# EAGLE board MainMicro (EAGLE 9.6.2)
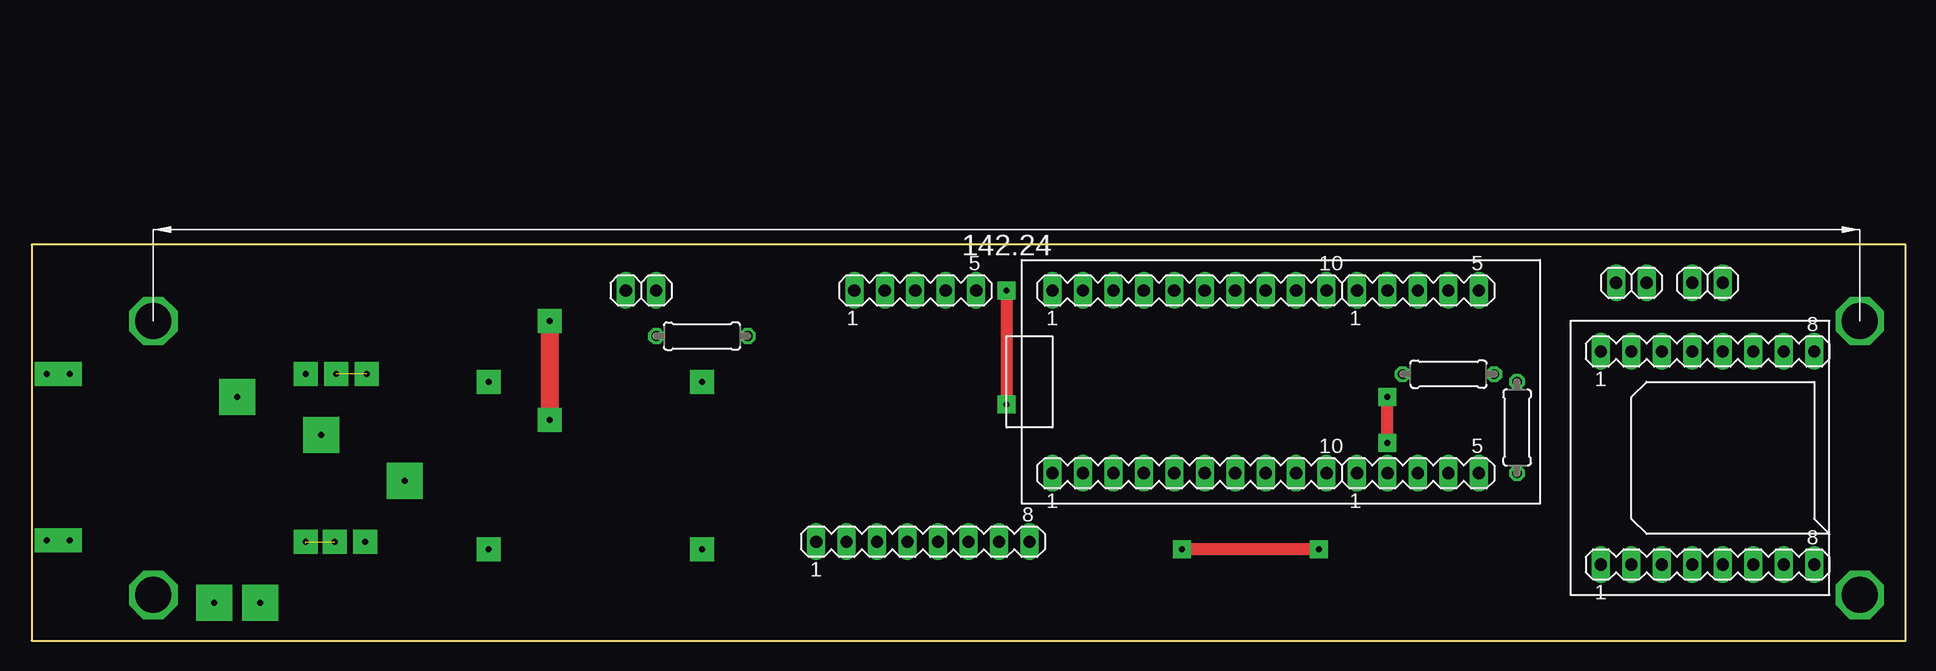
[diagram p0: board, top side]
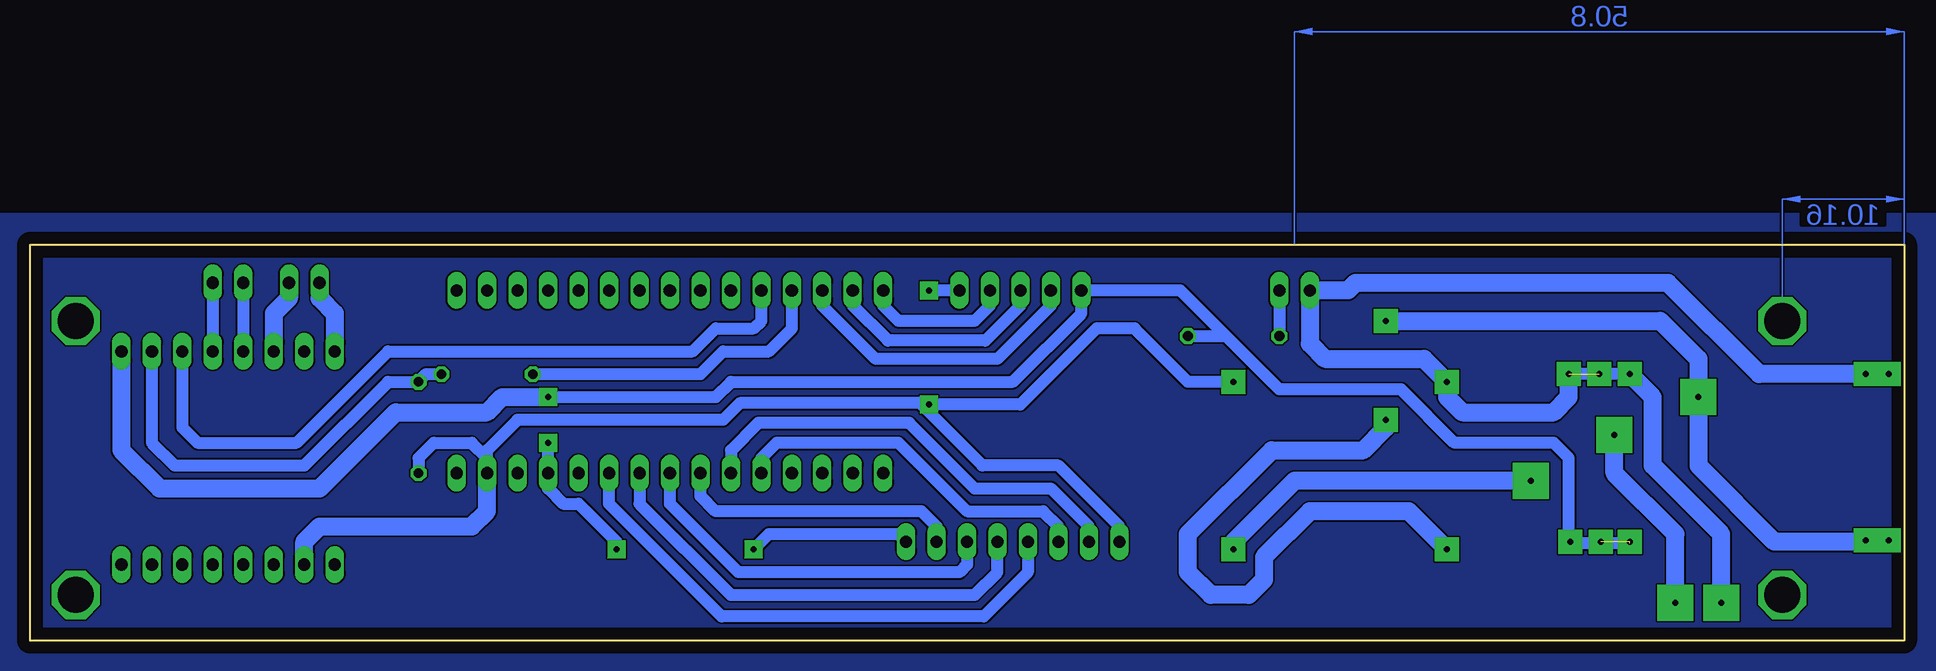
[diagram p1: board, bottom side, seen from below]

Size 156.21 x 33.02 mm. Coordinates in mm from the lower left corner, seen from the top.
Outline: 0,33.02 0,0 156.21,0 156.21,33.02 0,33.02
Copper layers (1*16): Top 0.035mm / dielectric 1.5mm / Bottom 0.035mm
Design rules "default": minimum track width 6mil, minimum drill 0.35mm, track to track 6mil, track to pad 6mil, pad to pad 6mil, via to via 6mil, smd to smd 6mil, copper to edge 40mil, drill to drill 6mil, minimum pad ring 10mil, minimum via ring 8mil, stop-mask expansion 4mil, vias tented up to drill 0mil, thermal gap 10mil

## Footprints (pad centres in the part's own frame; a part is rotated, then mirrored left to right if it is on the bottom)
MA10-1 = drill 1.016 long: 1 -11.43,0; 2 -8.89,0; 3 -6.35,0; 4 -3.81,0; 5 -1.27,0; 6 1.27,0; 7 3.81,0; 8 6.35,0; 9 8.89,0; 10 11.43,0
MA05-1 = drill 1.016 long: 1 -5.08,0; 2 -2.54,0; 3 0,0; 4 2.54,0; 5 5.08,0
MA08-1 = drill 1.016 long: 1 -8.89,0; 2 -6.35,0; 3 -3.81,0; 4 -1.27,0; 5 1.27,0; 6 3.81,0; 7 6.35,0; 8 8.89,0
1X02 = drill 1.016 long: 1 -1.27,0; 2 1.27,0
0207/7 = drill 0.813 octagon: 1 -3.81,0; 2 3.81,0

## Placement (x,y rotation side)
E$1  [MA10-1]  96.52,13.97 0 top
E$2  [MA05-1]  115.57,13.97 0 top
E$3  [MA10-1]  96.52,29.21 0 top
E$4  [MA05-1]  115.57,29.21 0 top
E$5  [MA08-1]  139.7,24.13 0 top
E$6  [MA08-1]  139.7,6.35 0 top
E$7  [MA05-1]  73.66,29.21 0 top
E$8  [MA08-1]  74.3,8.25 0 top
E$9  [1X02]  50.8,29.21 0 top
E$10  [0207/7]  55.88,25.4 180 top
E$11  [0207/7]  123.82,17.78 270 top
E$12  [0207/7]  118.11,22.23 0 top
E$13  [1X02]  133.35,29.84 0 top
E$14  [1X02]  139.7,29.84 0 top

## Library data of the parts
E$1-E$8 = con-lstb
E$9 E$13 E$14 = pinhead
E$10-E$12 = rcl

## Nets
S$5: E$7.5
S$7: E$1.9 E$8.5
S$11: E$5.1 E$13.1
S$14: E$9.1
S$17: E$1.10 E$8.4
S$18: E$1.6 E$8.2
S$19: E$1.5 E$8.3
S$20: E$1.8 E$8.6
S$21: E$3.1 E$7.4
S$22: E$1.7 E$8.7
S$23: E$3.2 E$7.3
S$24: E$3.3 E$7.2
S$25: E$2.4 E$6.2 E$8.1 E$11.2
S$26: E$5.3 E$13.2
S$27: E$9.2 E$10.2
S$29: E$2.2 E$5.8 E$7.1 E$8.8 E$10.1
S$30: E$5.4 E$14.1
S$31: E$5.7 E$11.1 E$12.2
S$32: E$3.5 E$5.6
S$33: E$3.4 E$12.1
S$34: E$5.5 E$14.2

## Tracks (layer width: path | path; a pad name or v marks a point on that pad's centre or on a via)
HUJ
  pour Bottom: -4.45,35.56 160.02,35.56 160.02,-7.62 -4.45,-7.62
S$1  (via drill 3 pad 4)
  other vias: 152.4,26.67
S$2  (via drill 3 pad 4)
  other vias: 152.4,3.81
S$3  (via drill 3 pad 4)
  other vias: 10.16,26.67
S$4  (via drill 3 pad 4)
  other vias: 10.16,3.81
S$5  (via drill 0.5 pad 1.5, 0.5 pad 2)
  Top 1: v81.28,29.21 v81.28,19.68
  Bottom 1: v55.88,21.59 59.69,21.59 64.13,26.04 67.31,26.04 73.66,19.68 v81.28,19.68 | E$7.5 v81.28,29.21
S$6  (via drill 0.5 pad 2, 0.5 pad 3)
  Top 1.5: v43.18,26.67 v43.18,18.41
  Bottom 1.5: v43.18,26.67 20.32,26.67 17.14,23.49 v17.14,20.32 17.14,14.6 10.79,8.25 3.17,8.25 | v38.1,7.62 41.27,10.8 49.53,10.8 53.34,6.98 53.34,5.08 54.61,3.81 57.78,3.81 59.69,5.71 59.69,8.89 52.7,15.88 45.09,15.88 43.18,17.78 v43.18,18.41
S$7
  Bottom 1: E$1.9 105.41,11.43 97.79,3.81 77.47,3.81 75.56,5.71 E$8.5
S$9  (via drill 0.5 pad 2)
  other vias: 1.27,8.38
S$10  (via drill 0.5 pad 2)
  other vias: 1.27,22.23
S$11
  Bottom 1.5: E$13.1 132.08,28.57 130.81,27.3 E$5.1
S$12  (via drill 0.5 pad 2)  (2 unrouted)
  Bottom 1: 22.86,8.13 27.69,8.13 v27.81,8.25
  other vias: 25.27,8.25 22.86,8.25
S$13  (via drill 0.5 pad 2)
  other vias: 3.17,8.38
S$14  (via drill 0.5 pad 2, 0.5 pad 3)  (2 unrouted)
  Bottom 1: v22.86,22.23 27.81,22.23
  Bottom 1.5: v3.17,22.23 12.06,22.23 19.68,29.84 45.72,29.84 46.35,29.21 E$9.1 49.53,24.77 48.26,23.49 40,23.49 v38.1,21.59 38.1,20.32 36.83,19.05 29.21,19.05 27.94,20.32 v27.94,22.23 | v15.24,3.17 15.24,8.89 20.95,14.6 20.95,20.32 v22.86,22.23
  other vias: 25.4,22.23
S$15  (via drill 0.5 pad 3)
  Bottom 1.5: v19.05,3.17 19.05,8.89 24.13,13.97 v24.13,17.14
S$16  (via drill 0.5 pad 2, 0.5 pad 3)
  Bottom 1.5: v31.11,13.34 50.8,13.34 55.88,8.25 v55.88,7.62
S$17
  Bottom 1: E$8.4 73.03,5.71 76.71,2.03 98.55,2.03 107.95,11.43 E$1.10
S$18
  Bottom 1: E$8.2 67.94,9.52 71.12,12.7 77.47,12.7 82.93,18.16 95.5,18.16 97.79,15.88 E$1.6
S$19
  Bottom 1: E$8.3 70.48,9.52 71.75,10.8 78.1,10.8 83.82,16.51 93.98,16.51 95.25,15.24 E$1.5
S$20
  Bottom 1: E$1.8 102.87,11.43 97.16,5.71 78.74,5.71 78.1,6.35 E$8.6
S$21
  Bottom 1: E$7.4 76.2,27.94 77.47,26.67 83.82,26.67 85.09,27.94 E$3.1
S$22
  Bottom 1: E$1.7 100.33,12.06 99.06,10.8 81.91,10.8 80.64,9.52 E$8.7
S$23
  Bottom 1: E$7.3 73.66,27.94 76.58,25.02 84.71,25.02 87.63,27.94 E$3.2
S$24
  Bottom 1: E$7.2 71.12,27.94 75.56,23.49 85.72,23.49 90.17,27.94 E$3.3
S$25
  Bottom 1: E$8.1 65.41,9.52 70.48,14.6 76.83,14.6 82.04,19.81 97.03,19.81 98.42,18.41 115.57,18.41 118.11,15.88 E$2.4 118.11,15.24 119.38,16.51 122.56,16.51 123.82,15.24 E$11.2
  Bottom 1.5: E$6.2 133.35,8.25 132.08,9.52 119.38,9.52 118.11,10.8 E$2.4
S$26
  Bottom 1.5: E$13.2 134.62,28.57 135.89,27.3 E$5.3
S$27
  Bottom 1: E$9.2 E$10.2
S$29  (via drill 0.5 pad 1.5)
  Top 1: v107.31,7.62 v95.88,7.62 | v113.03,16.51 v113.03,20.32
  Bottom 1: 27.94,8.25 27.94,15.24 29.21,16.51 37.46,16.51 41.91,20.95 52.07,20.95 56.52,25.4 | v107.31,7.62 107.31,8.25 110.49,11.43 111.76,11.43 113.03,12.7 E$2.2 v113.03,16.51 | E$8.8 83.82,8.89 94.61,8.89 v95.88,7.62 | v113.03,20.32 99.06,20.32 97.79,21.59 74.3,21.59 68.58,27.3 E$7.1 60.32,29.21 56.52,25.4 | E$10.1 56.52,25.4
  Bottom 1.5: E$5.8 148.59,15.88 145.41,12.7 132.08,12.7 125.73,19.05 118.11,19.05 116.84,20.32 v113.03,20.32
S$30
  Bottom 1: E$14.1 E$5.4
S$31
  Bottom 1: E$5.7 146.05,16.51 144.15,14.6 133.35,14.6 126.37,21.59 E$11.1 123.19,22.23 E$12.2
S$32
  Bottom 1: E$5.6 143.51,17.78 142.24,16.51 133.98,16.51 126.37,24.13 100.97,24.13 99.06,26.04 95.88,26.04 95.25,26.67 E$3.5
S$33
  Bottom 1: E$12.1 100.33,22.23 98.42,24.13 94.61,24.13 92.71,26.04 E$3.4
S$34
  Bottom 1: E$14.2 E$5.5
(copper drawn outside any net)
  shapes: Bottom area x2